# Altium PCB ecs8a_pcb_debug_v2.PcbDoc
Units mm, origin at the board's own origin, x right, y up, seen from the top; angles counter-clockwise.
Board outline 60 x 30 mm, 2 copper layers (Top Layer, Bottom Layer); 61 components, 42 nets, 184 pads, 87 vias.
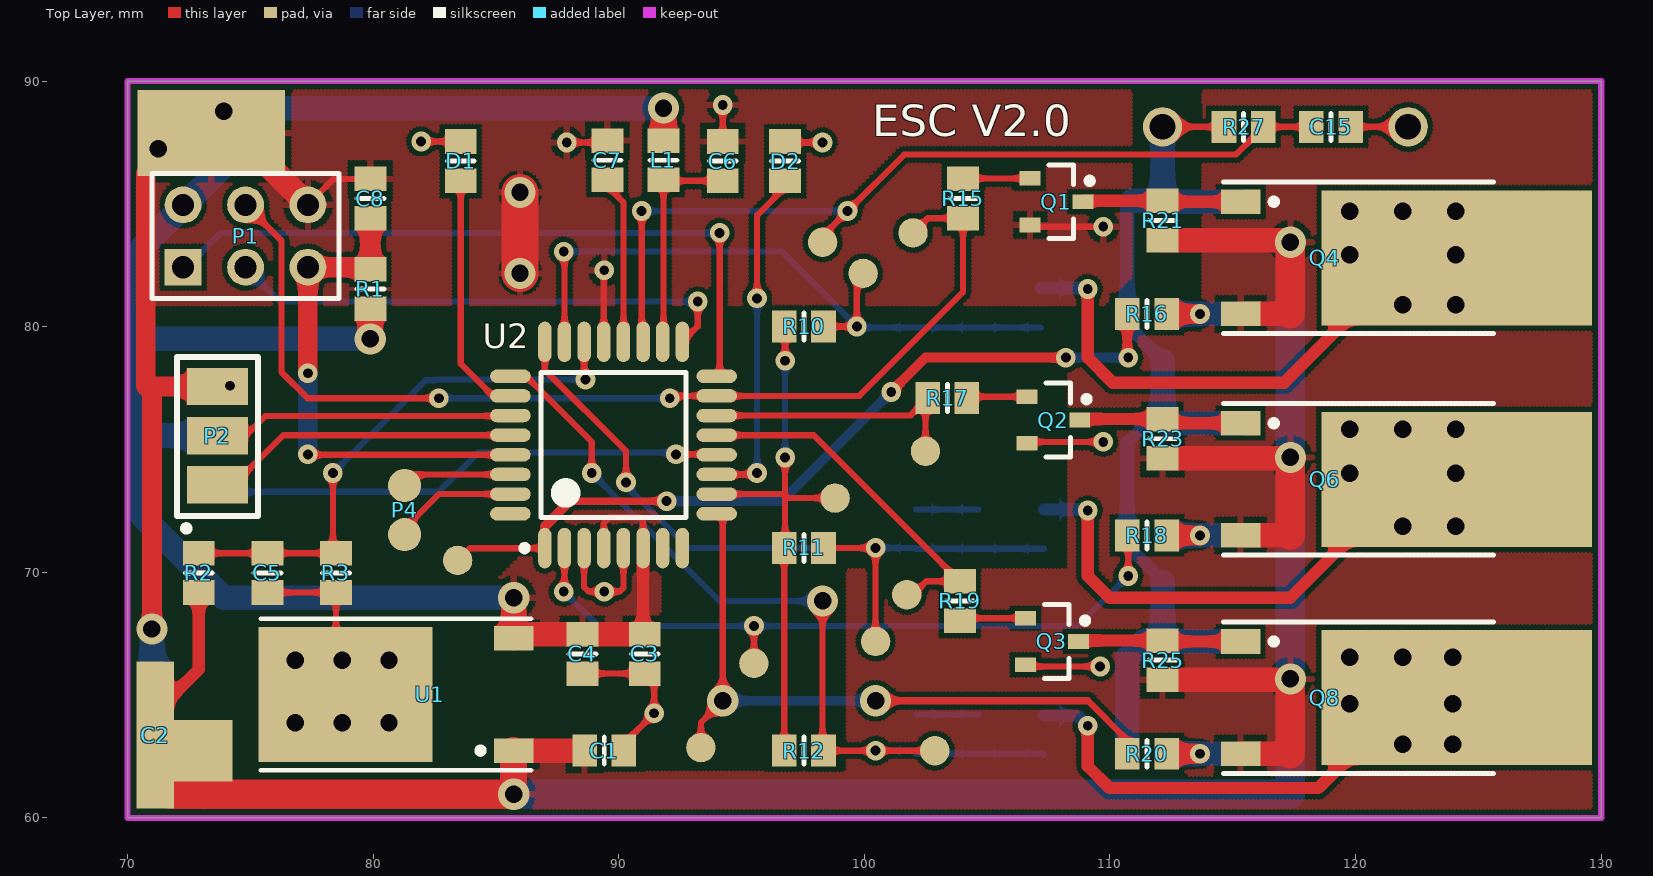
[diagram p0: Top Layer view]
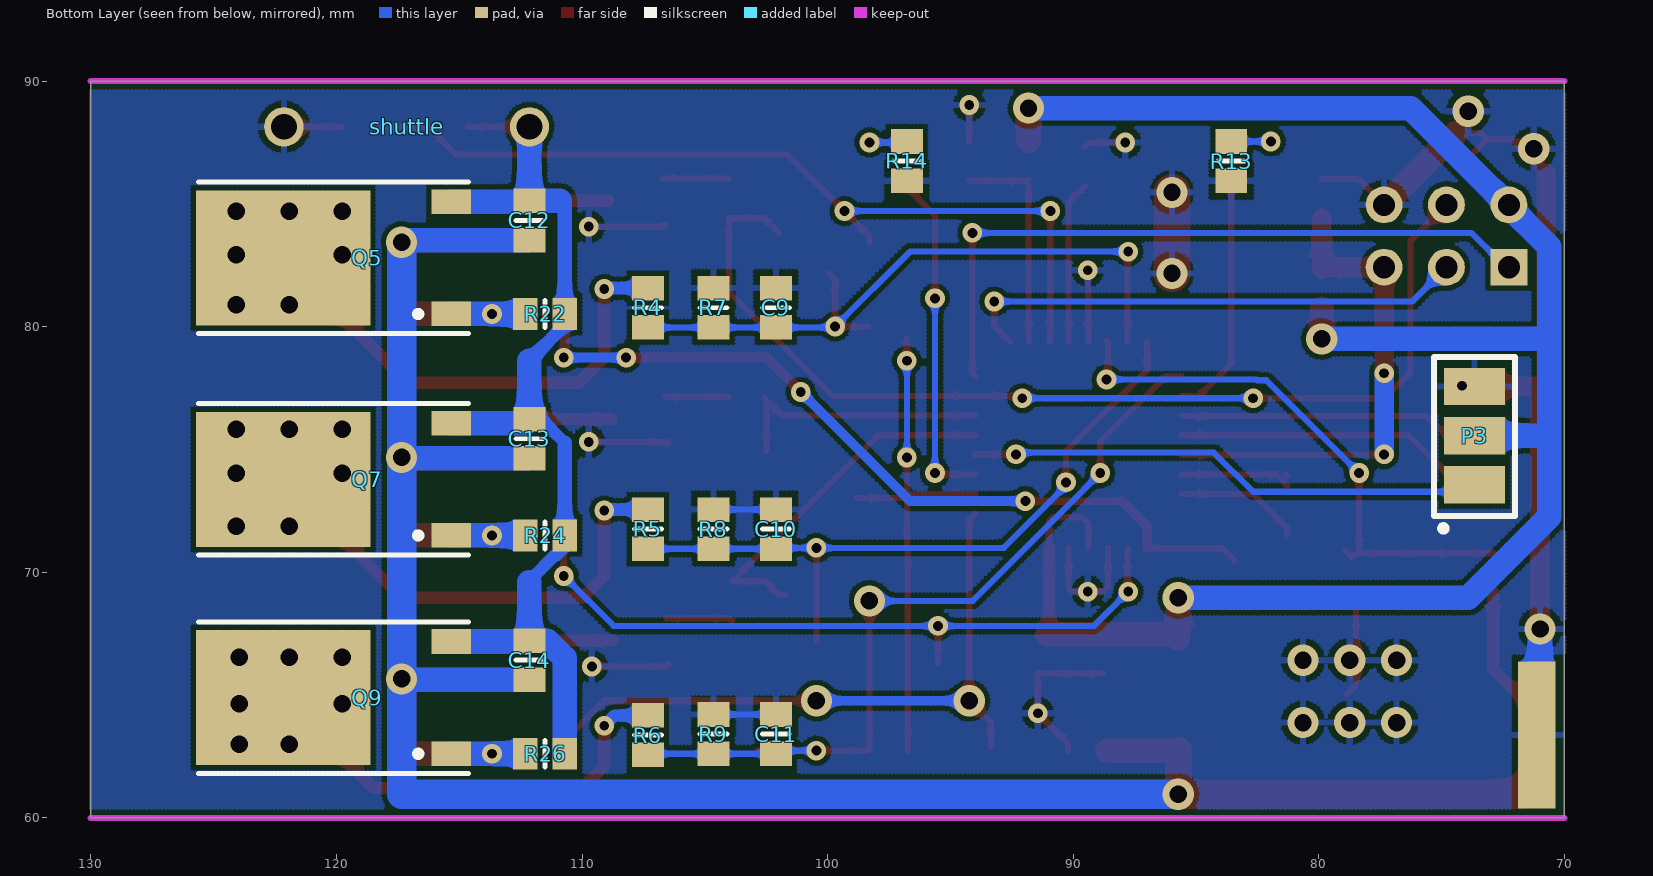
[diagram p1: Bottom Layer view, seen from below]

## Layer stack, top to bottom
Top Solder: solder mask 0.0102, Solder Resist, Dk 3.5
Top Layer: signal copper 0.0356
Dielectric 1: dielectric 0.32, FR-4, Dk 4.8
Bottom Layer: signal copper 0.0356
Bottom Solder: solder mask 0.0102, Solder Resist, Dk 3.5

## Board outline
70,60 70,90 130,90 130,60

## Design rules (kind name [scope] priority, off if disabled: settings)
Clearance [All] p1: gap=0.2
PolygonConnect [All] p1: connectstyle=Relief reliefconductorwidth=0.254 reliefentries=4 polygonreliefangle="90 Angle" airgapwidth=0.254
RoutingVias [All] p1: holewidth=0.711 width=1.27 viastyle="Through Hole" minholewidth=0.4 minwidth=0.8 maxholewidth=0.711 maxwidth=1.27
SolderMaskExpansion [All] p1: expansion=0.102
Width [All] p1: maxlimit=5 minlimit=0.254 preferedwidth=0.254
30 further rules are at their usual default settings.

## Components (designator, comment, footprint, x,y, rotation, side; value= is the part's Value field where it differs from the comment)
C1 "Cap" 6-0805_L 89.408,62.738 r180 top
C2 "Cap Pol1" double_size_c_2 71.12,63.373 r90 top
C3 "Cap" 6-0805_L 91.059,66.675 r90 top
C4 "Cap" 6-0805_L 88.519,66.675 r90 top
C5 "Cap" 6-0805_L 75.692,69.977 r270 top
C6 "Cap" 6-0805_L 94.234,86.741 r90 top
C7 "Cap" 6-0805_L 89.535,86.779 r90 top
C8 "Cap" 6-0805_L 79.883,85.217 r270 top
C9 "Cap" 6-0805_L 102.108,80.772 r90 bottom
C10 "Cap" 6-0805_L 102.108,71.755 r90 bottom
C11 "Cap" 6-0805_L 102.108,63.411 r90 bottom
C12 "Cap" 6-0805_L 112.141,84.328 r270 bottom
C13 "Cap" 6-0805_L 112.141,75.438 r270 bottom
C14 "Cap" 6-0805_L 112.141,66.421 r270 bottom
C15 "Cap" 6-0805_L 118.999,88.138 r180 top
D1 "LED0" 6-0805_L 83.566,86.741 r90 top
D2 "LED0" 6-0805_L 96.774,86.741 r90 top
L1 "Inductor" 6-0805_L 91.821,86.779 r270 top
P1 "Header 3X2" HDR2X3 72.263,82.423 r0 top
P2 "Header 3" i2c_headers 73.66,73.565 r90 top
P3 "Header 3" ppm_headers 73.66,73.565 r90 bottom
P4 "Header 2" uart_header3 81.28,73.533 r270 top
Q1 "2N3904" SOT23_L 107.823,85.09 r0 top
Q2 "2N3904" SOT23_L 107.696,76.2 r0 top
Q3 "2N3904" SOT23_L 107.637,67.183 r0 top
Q4 "IRFR5305" TO-252AA 118.749,82.804 r270 top
Q5 "IRFR1205" TO-252AA 118.749,82.804 r90 bottom
Q6 "IRFR5305" TO-252AA 118.745,73.787 r270 top
Q7 "IRFR1205" TO-252AA 118.745,73.787 r90 bottom
Q8 "IRFR5305" TO-252AA 118.745,64.897 r270 top
Q9 "IRFR1205" TO-252AA 118.745,64.897 r90 bottom
R1 "Res3" 6-0805_L 79.883,81.534 r270 top
R2 "Res3" 6-0805_L 72.898,69.977 r270 top
R3 "Res3" 6-0805_L 78.486,69.977 r90 top
R4 "Res3" 6-0805_L 107.315,80.772 r270 bottom
R5 "Res3" 6-0805_L 107.315,71.755 r270 bottom
R6 "Res3" 6-0805_L 107.315,63.373 r270 bottom
R7 "Res3" 6-0805_L 104.648,80.772 r270 bottom
R8 "Res3" 6-0805_L 104.648,71.755 r270 bottom
R9 "Res3" 6-0805_L 104.648,63.411 r270 bottom
R10 "Res3" 6-0805_L 97.536,80.01 r180 top
R11 "Res3" 6-0805_L 97.536,70.993 r180 top
R12 "Res3" 6-0805_L 97.536,62.738 r180 top
R13 "Res3" 6-0805_L 83.566,86.741 r90 bottom
R14 "Res3" 6-0805_L 96.774,86.741 r90 bottom
R15 "Res1" 6-0805_L 104.013,85.217 r270 top
R16 "Res1" 6-0805_L 111.506,80.518 r180 top
R17 "Res1" 6-0805_L 103.378,77.089 r180 top
R18 "Res1" 6-0805_L 111.506,71.501 r180 top
R19 "Res1" 6-0805_L 103.886,68.834 r90 top
R20 "Res1" 6-0805_L 111.506,62.611 r180 top
R21 "Res3" 6-0805_L 112.141,84.328 r90 top
R22 "Res3" 6-0805_L 111.506,80.518 r0 bottom
R23 "Res3" 6-0805_L 112.141,75.438 r90 top
R24 "Res3" 6-0805_L 111.506,71.501 r0 bottom
R25 "Res3" 6-0805_L 112.141,66.421 r90 top
R26 "Res3" 6-0805_L 111.506,62.611 r0 bottom
R27 "Res3" 6-0805_L 115.443,88.138 r0 top
shuttle "Res1" shuttle2 122.141,88.138 r180 bottom
U1 "78M05" TO-252AA 82.296,65.024 r90 top
U2 "ATmega8A-AU" 32A_N 89.789,75.184 r90 top

## Footprints (in the part's own frame and the unit in brackets; to place one, negate y for a bottom-side part, rotate by r counter-clockwise, add the part's x,y. Pads: shape width x height; smd on the part's side, far side on the other; paste and mask are expansions set on the pad)
6-0805_L [mm] "Chip Resistor, Body 2.0x1.2mm, IPC High Density"
  rect 1x1.3 smd: 1(-0.8,0) 2(0.8,0)
  silkscreen extent 0,-0.55 0,0.55, body extent -1.07,-0.7 1.07,0.7, height 0.7
32A_N [mm] "Thin QFP, 32-Leads, Body 7x7mm, Pitch 0.8mm, IPC Medium Density"
  oval 1.65x0.55 smd: 1(-4.2,2.8) 2(-4.2,2) 3(-4.2,1.2) 4(-4.2,0.4) 5(-4.2,-0.4) 6(-4.2,-1.2) 7(-4.2,-2) 8(-4.2,-2.8) 17(4.2,-2.8) 18(4.2,-2) 19(4.2,-1.2) 20(4.2,-0.4) 21(4.2,0.4) 22(4.2,1.2) 23(4.2,2) 24(4.2,2.8)
  oval 0.55x1.65 smd: 9(-2.8,-4.2) 10(-2,-4.2) 11(-1.2,-4.2) 12(-0.4,-4.2) 13(0.4,-4.2) 14(1.2,-4.2) 15(2,-4.2) 16(2.8,-4.2) 25(2.8,4.2) 26(2,4.2) 27(1.2,4.2) 28(0.4,4.2) 29(-0.4,4.2) 30(-1.2,4.2) 31(-2,4.2) 32(-2.8,4.2)
  silkscreen extent -4.32,-2.95 2.95,3.75, body extent -3.5,-3.5 3.5,3.5, height 1.2
double_size_c_2 [mm]
  rect 6x1.524 smd: 1(0,0)
  rect 6x1.524 smd far side: 2(0,0)
HDR2X3 [mm] "Connector; Header; 3x2 Position"
  rect 1.5x1.5 hole 0.9: 1(0,0)
  round 1.5 hole 0.9: 2(0,2.54) 3(2.54,0) 4(2.54,2.54) 5(5.08,0) 6(5.08,2.54)
  silkscreen extent -1.27,-1.27 6.35,3.81
i2c_headers [mm]
  rect 1.524x2.5 smd: 1(2,0) 2(0,0) 3(4,0)
  silkscreen extent -1.9,-1.65 5.21,1.65
ppm_headers [mm]
  rect 1.524x2.5 smd: 1(2,0) 2(0,0) 3(4,0)
  silkscreen extent -1.9,-1.65 5.21,1.65
shuttle2 [mm]
  round 1.6 hole 1.05: 1(0,0) 2(10,0)
SOT23_L [mm] "SOT23, 3-Leads, Body 2.9x1.3mm, Pitch 0.95mm, Lead Span 2.3mm - Reverse Pinning, IPC High Density"
  rect 0.85x0.6 smd: 1(1.075,0) 2(-1.075,-0.95) 3(-1.075,0.95)
  silkscreen extent -0.3,-1.5 1.48,1.5, body extent -0.7,-1.5 0.7,1.5, height 1.1
TO-252AA [mm] "D-PAK/TO-252-AA; 3 Leads (1 Cropped); Body 10.4 (inc. leads) x 6.7 mm (LxW max)"
  rect 1x1.6 smd: 1(-2.285,-3.425) 3(2.285,-3.425)
  rect 5.5x7.1 smd: 4(0,3.425)
  silkscreen extent -3.08,-4.13 3.08,6.88
uart_header3 [mm]
  round 1.35 smd: 1(0,0) 2(2,0)

## Part data
C1 C3 C4 C5 C6 C7 C8 C9 C10 C11 C12 C13 C14 C15: "Capacitor"
C2: "Polarized Capacitor (Radial)"
D1 D2: "Typical INFRARED GaAs LED"
P1: "Header, 3-Pin, Dual row"
P2 P3: "Header, 3-Pin"
P4: "Header, 2-Pin"
Q1 Q2 Q3: "NPN General Purpose Amplifier"
Q4 Q5 Q6 Q7 Q8 Q9: "HEXFET Power MOSFET"
R1 R2 R3 R4 R5 R6 R7 R8 R9 R10 R11 R12 R13 R14 R15 R16 R17 R18 R19 R20 R21 R22 R23 R24 R25 R26 R27 shuttle: "Resistor"
U1: library part Component_1
U2: "8-bit AVR Microcontroller, 2.7-5.5V, 16MHz, 8KB Flash, 512 Bytes EEPROM, 1KB SRAM, 32-pin TQFP, Industrial Grade (-40°C to 85°C)"

## Free pads (board coordinates)
  rect 6x3.5 smd: 4(73.406,87.884)
  rect 4x5.5 smd: 5(127.635,82.804) 6(127.635,73.787) 7(127.635,64.897)
  round 1.2 smd: 8(102.489,74.93) 9(101.727,69.088) 10(101.981,83.82) 11(98.806,73.025) 12(99.949,82.169) 13(100.457,67.183) 14(102.87,62.738) 15(98.298,83.439) 16(93.345,62.865) 17(83.439,70.485) 18(95.504,66.294)
  rect 2.5x2.5 smd: 19(73.025,62.738)

## Via types
v1: diameter 0.8, hole 0.4, Top Layer to Bottom Layer, 45 vias
v2: diameter 1.27, hole 0.711, Top Layer to Bottom Layer, 42 vias

## Nets (pads, with @x,y where several pads share a name; then routed paths per layer and width w, separated by ;. In a path a pad name is that pad's centre, name@x,y a point inside that pad or via, vN(x,y) a via of type N, cw(c..) or ccw(c..) an arc to the next point about the centre after c; other vN are vias at no path point)
+5V: C3.2 C4.2 L1.1 P1.2 P3.1 R1.2 U1.3 U2.4 U2.6 | length 80.2
  Top Layer w0.254: U1.3 U1.3@85.887,67.475 ; v2@85.721,68.957 v2(85.725,68.961) ; U2.4 89.389,71.99 89.662,72.263 89.691,72.263 89.71,72.244 90.824,72.244 90.989,72.079 U2.6 ; C3.2@90.989,67.545 C3.2
  Top Layer w0.5: C3.2@90.989,67.545 U2.6
  Top Layer w1: v2(79.883,79.502) R1.2 ; U1.3 v2@85.721,68.957 ; U1.3@85.887,67.475 C4.2 C3.2 ; L1.1 v2(91.821,88.9)
  Bottom Layer w0.254: 70.612,79.629 70.739,79.502
  Bottom Layer w1: 70.739,79.502 v2(79.883,79.502) ; 70.866,75.565 P3.1 ; v2(85.725,68.961) 73.914,68.961 70.612,72.263 70.612,79.629 70.612,83.262 76.25,88.9 v2(91.821,88.9)
AH: P1.4 pad.10 R15.2 U2.15 | length 42.7
  Top Layer w0.254: P1.4 76.266,83.5 76.266,78.154 77.331,77.089 v1(82.677,77.089) ; v1(92.075,77.089) 92.17,77.184 U2.15 99.79,77.184 104.013,81.407 R15.2 102.578,84.417 pad.10
  Bottom Layer w0.254: v1(82.677,77.089) v1(92.075,77.089)
AL: pad.17 R16.2 U2.1 | length 33
  Top Layer w0.254: pad.17 83.938,70.984 U2.1 ; v1@110.706,78.778 v1(110.744,78.74)
  Top Layer w0.3: 88.011,72.898 v1(91.948,72.898)
  Top Layer w0.4: U2.1 86.989,71.876 88.011,72.898 ; v1(101.092,77.343) 102.489,78.74 v1(108.204,78.74) ; v1@110.706,78.778 R16.2
  Bottom Layer w0.4: v1(91.948,72.898) 96.647,72.898 v1(101.092,77.343) ; v1(108.204,78.74) v1(110.744,78.74)
AVERAGE: pad.11 R10.2 R11.2 R12.2 U2.10 | length 21.7
  Top Layer w0.254: U2.10 96.742,73.184 96.774,73.152 ; R12.2 R11.2 96.774,71.031 96.774,73.152 ; v1(96.774,74.676) 96.774,73.152 ; v1(96.774,78.613) R10.2@96.774,79.54 ; pad.11 96.901,73.025 96.774,73.152
  Bottom Layer w0.254: v1(96.774,74.676) v1(96.774,78.613)
BH: pad.8 R17.2 U2.14 | length 11
  Top Layer w0.254: U2.14 101.873,76.384 R17.2@102.489,77 ; pad.8 R17.2@102.489,77 ; R17.2 R17.2@102.489,77
BL: pad.18 R18.2 U2.2 | length 29.4
  Top Layer w0.254: v1(87.757,69.215) 87.789,69.247 U2.2 ; pad.18 v1(95.504,67.818) ; R18.2 110.744,71.463 v1(110.744,69.85)
  Bottom Layer w0.254: v1(87.757,69.215) 89.154,67.818 v1(95.504,67.818) 108.712,67.818 v1(110.744,69.85)
CH: pad.9 R19.2 U2.13 | length 14.7
  Top Layer w0.254: U2.13 97.936,75.584 R19.2 102.527,69.634 101.981,69.088 pad.9
CL: pad.16 R20.2 U2.9 | length 27.8
  Top Layer w0.254: pad.16 93.345,63.881 v2(94.234,64.77) 94.234,72.139 U2.9 ; 109.105,64.77 110.706,63.169 R20.2
  Top Layer w0.3: v2(100.457,64.77) 109.105,64.77
  Bottom Layer w0.4: v2(94.234,64.77) 100.203,64.77 100.33,64.897 v2(100.457,64.77)
CURRENT: C15.2 pad.15 R27.2 U2.19 | length 35.7
  Top Layer w0.254: v1(90.932,84.709) 90.932,79.441 U2.19 ; pad.15 98.298,83.693 v1(99.314,84.709) 101.616,87.011 115.128,87.011 116.243,88.126 R27.2 C15.2
  Bottom Layer w0.254: v1(90.932,84.709) v1(99.314,84.709)
GND: C1.1 C2.2 C3.1 C4.1 C5.2 C6.2 C7.2 C8.1 C9.2 C10.2 C11.2 C15.1 P1.6 P2.3 P3.3 pad.4 Q1.2 Q2.2 Q3.2 R3.1 R7.1 R8.1 R9.1 R13.1 R14.1 shuttle.1 U1.4 U2.3 U2.5 U2.21 | length 82.7
  Top Layer w0.254: 70.739,77.597 70.771,77.565 ; pad.4@70.739,86.233 72.136,87.63 pad.4@73.152,87.63 ; pad.4@73.66,87.122 pad.4@73.152,87.63 ; pad.4@74.422,87.884 pad.4 pad.4@73.152,87.63 ; C5.2 R3.1 78.486,65.409 U1.4 ; P1.6 78.397,86.017 C8.1 ; v1(87.884,87.503) 89.357,87.503 C7.2@89.535,87.325 ; U2.3 88.589,69.399 88.773,69.215 v1(89.408,69.215) 90.043,69.215 90.189,69.361 U2.5 ; C4.1@88.773,65.875 C3.1 91.44,65.875 v1(91.44,64.262) 90.208,63.03 C1.1 ; U2.21 89.389,82.277 v1(89.408,82.296) ; C6.2 v1(94.234,89.027) ; Q3.2 106.492,66.233 106.558,66.167 v1(109.601,66.167) ; Q2.2 106.492,75.25 106.553,75.311 v1(109.728,75.311) v1@109.855,75.311 ; Q1.2 106.619,84.14 106.685,84.074 v1(109.728,84.074) ; C15.1 shuttle.1
  Top Layer w0.8: 70.739,77.597 pad.4@70.739,86.233 ; v2(70.993,67.691) 70.993,77.343 70.771,77.565 P2.3
  Top Layer w1: pad.4@74.422,87.884 P1.6
  Top Layer w1.5: v2(85.979,82.169) v2(85.979,85.471)
  Bottom Layer w0.254: C2.2@70.993,63.5 C2.2 ; C11.2 R9.1 ; C10.2 R8.1
  Bottom Layer w1: C2.2@70.993,63.5 C2.2@71.247,63.754 ; C2.2@70.993,64.516 v2(70.993,67.691)
  other v1: 74.168,77.597
  other v2: 76.835,63.881 78.74,63.881 80.645,63.881 76.835,66.421 78.74,66.421 80.645,66.421 71.247,87.249 73.914,88.773
GREEN: D2.1 U2.11 | length 13.8
  Top Layer w0.254: U2.11 95.574,73.984 v1(95.631,74.041) ; v1(95.631,81.153) 95.631,84.544 D2.1@96.774,85.687
  Bottom Layer w0.254: v1(95.631,74.041) v1(95.631,81.153)
MISO: P1.1 U2.16 | length 28.9
  Top Layer w0.254: U2.16 94.107,78.102 v1(94.107,83.82)
  Bottom Layer w0.254: P1.1@72.707,82.867 P1.1 72.39,82.423 73.787,83.82 v1(94.107,83.82)
NetC6_1: C6.1 L1.2 U2.18 | length 8.8
  Top Layer w0.254: U2.18 91.821,79.416 L1.2@91.821,85.687 ; L1.2@91.789,85.693 91.795,85.687 L1.2@91.821,85.687 ; L1.2@91.821,85.725 L1.2@91.821,85.687 ; L1.2 91.859,85.941 C6.1
NetC7_1: C7.1 U2.20 | length 6.6
  Top Layer w0.254: C7.1@89.535,85.725 90.189,85.071 U2.20
NetC12_1: C12.1 C13.1 C14.1 Q5.3 Q7.3 Q9.3 R22.1 R24.1 R26.1 R27.1 shuttle.2 | length 42.3
  Top Layer w0.254: shuttle.2 R27.1
  Bottom Layer w0.254: R26.1 R26.1@110.709,62.614 ; 110.706,66.51 110.706,66.471 110.709,66.468 ; R24.1@110.706,71.031 R24.1 ; R22.1@110.706,80.048 R22.1 ; 110.706,84.925 110.909,85.128 ; 111.417,67.221 C14.1 C14.1@112.18,67.182 ; C13.1@111.671,76.238 C13.1@111.722,76.238 ; C13.1@112.141,76.657 C13.1@111.722,76.238 ; C12.1 C12.1@112.18,85.089 ; C13.1@112.307,76.072 C13.1 C13.1@111.722,76.238
  Bottom Layer w0.5: R24.1@110.706,71.031 111.037,70.7 111.096,70.7 112.141,69.655 112.141,69.596 ; 110.706,75.273 C13.1@111.671,76.238 ; R22.1@110.706,80.048 112.141,78.613
  Bottom Layer w0.6: R24.1 110.706,75.273 ; R22.1 110.706,84.925
  Bottom Layer w1: 110.706,66.51 111.417,67.221 ; R26.1@110.709,62.614 110.709,66.468 ; 110.909,85.128 C12.1 shuttle.2 ; C14.1 112.141,69.596 ; C13.1@112.141,76.657 112.141,78.613 ; C14.1@112.18,67.182 Q9.3 ; C12.1@112.18,85.089 Q5.3 ; C13.1@112.307,76.072 Q7.3
NetD1_2: D1.2 R13.2 | length 3.2
  Top Layer w0.254: v1(81.953,87.541) D1.2
  Bottom Layer w0.254: v1(81.953,87.541) R13.2
NetD2_2: D2.2 R14.2 | length 3.3
  Top Layer w0.254: D2.2@96.774,87.287 96.812,87.249 97.066,87.503 v1(98.298,87.503)
  Bottom Layer w0.254: R14.2@96.774,87.287 96.812,87.249 97.066,87.503 v1(98.298,87.503)
NetQ1_1: Q1.1 Q4.1 R21.2 | length 6.5
  Top Layer w0.254: Q1.1 Q1.1@108.936,85.128 ; R21.2 R21.2@112.18,85.089
  Top Layer w0.5: Q1.1@108.936,85.128 R21.2 ; R21.2@112.18,85.089 Q4.1
NetQ1_3: Q1.3 R15.1 | length 2.7
  Top Layer w0.254: R15.1 104.036,86.04 Q1.3
NetQ2_1: Q2.1 Q6.1 R23.2 | length 6.6
  Top Layer w0.254: Q2.1 Q2.1@108.809,76.238 ; R23.2 R23.2@112.307,76.072
  Top Layer w0.5: Q2.1@108.809,76.238 R23.2 ; R23.2@112.307,76.072 Q6.1
NetQ2_3: Q2.3 R17.1 | length 2.6
  Top Layer w0.254: R17.1@104.013,77.127 104.036,77.15 Q2.3
NetQ3_1: Q3.1 Q8.1 R25.2 | length 6.6
  Top Layer w0.254: Q3.1 Q3.1@108.75,67.221 ; R25.2 R25.2@112.18,67.182
  Top Layer w0.5: Q3.1@108.75,67.221 R25.2 ; R25.2@112.18,67.182 Q8.1
NetQ3_3: Q3.3 R19.1 | length 2.7
  Top Layer w0.254: R19.1 103.985,68.133 Q3.3 Q3.3@106.539,68.11
NetQ5_1: Q5.1 R16.1 R22.2 | length 4.4
  Top Layer w0.8: R16.1 v1(113.665,80.518)
  Bottom Layer w0.254: R22.2 R22.2
  Bottom Layer w1: R22.2 Q5.1
NetQ7_1: Q7.1 R18.1 R24.2 | length 4.4
  Top Layer w0.8: R18.1 v1(113.665,71.501)
  Bottom Layer w0.254: R24.2 R24.2
  Bottom Layer w1: R24.2 Q7.1
NetQ9_1: Q9.1 R20.1 R26.2 | length 4.4
  Top Layer w0.8: R20.1 v1(113.665,62.611)
  Bottom Layer w0.254: R26.2 R26.2 ; v1(113.665,62.611) v1(113.665,62.611)
  Bottom Layer w1: R26.2 v1(113.665,62.611) ; v1(113.665,62.611) Q9.1
NULLA: C9.1 pad.12 R4.2 R7.2 R10.1 U2.23 | length 28
  Top Layer w0.254: v1(87.757,83.058) 87.789,83.026 U2.23 ; R10.1 v1(99.695,80.01) 99.695,81.915 pad.12
  Bottom Layer w0.254: v1(87.757,83.058) 96.647,83.058 v1(99.695,80.01) 99.733,79.972 C9.1 R7.2 R4.2@107.188,79.972
NULLB: C10.1 pad.13 R5.2 R8.2 R11.1 U2.24 | length 30.7
  Top Layer w0.254: U2.24 86.989,78.238 90.297,74.93 v1(90.297,73.66) ; 98.844,70.993 v1(100.457,70.993) pad.13
  Bottom Layer w0.254: v1(90.297,73.66) 90.297,73.521 92.825,70.993 v1(100.457,70.993) 102.07,70.993 C10.1 R8.2 R5.2
NULLC: C11.1 pad.14 R6.2 R9.2 R12.1 U2.25 | length 34.8
  Top Layer w0.254: U2.25 86.227,77.984 88.9,75.311 v1(88.9,74.041) ; v2(98.298,68.834) 98.298,62.776 R12.1 v1(100.457,62.738) pad.14
  Bottom Layer w0.254: v1(88.9,74.041) 89.57,73.371 89.57,73.359 94.095,68.834 v2(98.298,68.834) ; v1(100.457,62.738) 101.981,62.738 C11.1 R9.2 107.277,62.611 R6.2
PHASEA: pad.5 Q4.4 Q5.4 R4.1 | length 20.3
  Top Layer w0.5: v1(109.093,81.534) 109.093,78.74 110.109,77.724 117.094,77.724 Q4.4
  Bottom Layer w0.254: v1@109.055,81.572 v1(109.093,81.534)
  Bottom Layer w0.5: R4.1@107.188,81.572 R4.1 v1@109.055,81.572
  other v2: 121.92,80.899 124.079,80.899 119.761,82.931 124.079,82.931 119.761,84.709 121.92,84.709 124.079,84.709
PHASEB: pad.6 Q6.4 Q7.4 R5.1 | length 19.9
  Top Layer w0.5: v1(109.093,72.517) 109.093,69.85 109.982,68.961 117.344,68.961 Q6.4
  Bottom Layer w0.254: v1@109.055,72.555 v1(109.093,72.517)
  Bottom Layer w0.5: R5.1 v1@109.055,72.555
  other v2: 121.92,71.882 124.079,71.882 119.761,74.041 124.079,74.041 119.761,75.819 121.92,75.819 124.079,75.819
PHASEC: pad.7 Q8.4 Q9.4 R6.1 | length 18.6
  Top Layer w0.5: v1(109.093,63.754) 109.093,62.103 109.982,61.214 118.487,61.214 Q8.4
  Bottom Layer w0.5: R6.1 108.674,64.173 v1(109.093,63.754)
  other v2: 121.92,62.992 123.952,62.992 119.761,64.643 123.952,64.643 119.761,66.548 121.92,66.548 123.952,66.548
PPM: P3.2 U2.12 | length 21.1
  Top Layer w0.254: v1(92.329,74.803) 93.97,74.803 U2.12
  Bottom Layer w0.254: P3.2 73.946,73.279 82.677,73.279 84.274,74.876 92.256,74.876 v1(92.329,74.803)
RED: D1.1 U2.26 | length 10
  Top Layer w0.254: D1.1 83.566,78.486 84.868,77.184 U2.26
RESET: C8.2 P1.5 R1.1 U2.29 | length 20.5
  Top Layer w0.254: v1(77.343,74.803) 77.362,74.784 U2.29 ; R1.1@79.794,82.423 R1.1
  Top Layer w0.8: v1(77.343,78.105) P1.5 R1.1@79.794,82.423 ; R1.1 C8.2
  Bottom Layer w0.8: v1(77.343,74.803) v1(77.343,78.105)
RXD: P4.1 U2.30 | length 4.6
  Top Layer w0.254: P4.1 81.731,73.984 U2.30 ; P4.1@81.28,73.914 P4.1@81.35,73.984
SCK: P1.3 U2.17 | length 20.9
  Top Layer w0.254: U2.17 93.218,80.013 v1(93.218,81.026)
  Bottom Layer w0.254: P1.3 76.2,81.026 v1(93.218,81.026)
SCL: P2.2 U2.28 | length 12.8
  Top Layer w0.254: P2.2 74.327,73.565 76.346,75.584 U2.28
SDA: P2.1 U2.27 | length 12.3
  Top Layer w0.254: P2.1 74.803,75.565 75.6,76.362 85.567,76.362 U2.27
TXD: P4.2 U2.31 | length 5.1
  Top Layer w0.254: P4.2 81.28,71.787 82.677,73.184 U2.31
UBAT: C5.1 R2.1 R3.2 U2.22 | length 23
  Top Layer w0.254: R2.1 C5.1 R3.2 ; v1(78.359,74.041) 78.359,70.904 R3.2 ; R3.2@78.905,70.866 78.651,70.612 R3.2 ; v1(88.646,77.851) 88.589,77.908 U2.22 U2.22@88.646,79.441
  Bottom Layer w0.254: v1(78.359,74.041) 82.134,77.816 82.515,77.816 82.55,77.851 v1(88.646,77.851)
VCC: C1.2 C2.1 C12.2 C13.2 C14.2 pad.19 Q4.3 Q6.3 Q8.3 R2.2 R21.1 R23.1 R25.1 U1.1 | length 126
  Top Layer w0.254: v2(85.721,60.966) 85.721,60.962 85.721,60.839 v2@85.725,60.835 ; C1.2 C1.2 ; v2@117.259,83.528 v2(117.348,83.439) ; v2@117.31,65.621 v2(117.348,65.659) ; v2@117.31,74.638 v2(117.348,74.676) ; 117.347,62.612 117.348,62.611 ; 117.347,71.502 117.348,71.501 ; 117.347,80.519 117.348,80.518
  Top Layer w0.5: C2.1 71.12,64.262 72.898,66.04 R2.2
  Top Layer w1: U1.1 C1.2 ; R25.1 v2@117.31,65.621 ; R23.1 v2@117.31,74.638 ; R21.1 v2@117.259,83.528 ; Q8.3 117.347,62.612 ; Q6.3 117.347,71.502 ; Q4.3 117.347,80.519
  Top Layer w1.1: v2(85.721,60.966) U1.1
  Top Layer w1.2: C2.1@71.755,60.962 v2@85.721,60.962 ; 117.348,62.611 v2(117.348,65.659) ; 117.348,71.501 v2(117.348,74.676) ; 117.348,80.518 v2(117.348,83.439)
  Bottom Layer w0.254: v2@117.259,83.528 v2(117.348,83.439) ; v2@117.31,65.621 v2(117.348,65.659) ; v2@117.31,74.638 v2(117.348,74.676)
  Bottom Layer w1: C14.2 v2@117.31,65.621 ; C13.2 v2@117.31,74.638 ; C12.2 v2@117.259,83.528
  Bottom Layer w1.2: v2@85.721,60.962 117.346,60.962 ; 117.348,60.964 v2(117.348,65.659) v2(117.348,74.676) v2(117.348,83.439)
pads on no net: U2.7 U2.8 U2.32

## Polygon pours and split planes (outlines as drawn)
GND on Bottom Layer "bottom-gnd" (hatched 90Degree grid 0 track 0.152, remove dead copper, pour order 14): 70,90 130,90 130,60 70,60 70,90
+5V on Top Layer "top-5v-1" (hatched 90Degree grid 0 track 0.152, remove dead copper, pour order 22): 91.694,67.945 91.694,72.263 91.44,72.517 88.265,72.517 87.884,72.517 85.09,69.723 85.095,69.718 85.095,67.931 91.68,67.931 91.694,67.945
VCC on Top Layer "top-vcc-1" (hatched 90Degree grid 0 track 0.152, remove dead copper, pour order 20): 85.852,60 85.852,62.357 89.027,62.357 89.027,61.849 99.314,61.849 99.314,66.04 99.314,70.104 108.331,70.104 108.331,79.756 113.665,79.756 113.792,79.629 113.792,90 130,90 130,60 85.852,60
GND on Top Layer "top-gnd-1" (hatched 90Degree grid 0 track 0.152, remove dead copper, pour order 18): 76.454,90 110.871,90 110.871,82.042 109.982,81.153 109.728,80.899 69.977,80.899 69.977,89.977 70,90 76.454,90

## Keep-outs
Top Layer:
  lines w0.254: 70,60 70,90 ; 130,60 130,90
Keep-Out Layer:
  lines w0.254: 70,60 130,60 ; 70,90 130,90

## Silkscreen, mask and mechanical layers (free items; w line width, h text height)
Top Overlay:
  text "ESC V2.0" at 100.33,87.757 h1.3